# Altium PCB PCB_2020-01-20 19_33_48.pcbdoc
Units mm, origin at the board's own origin, x right, y up, seen from the top; angles counter-clockwise.
Board outline 121.43 x 96.61 mm, 2 copper layers (Top Layer, Bottom Layer); 25 components, 35 nets, 80 pads, 175 vias.
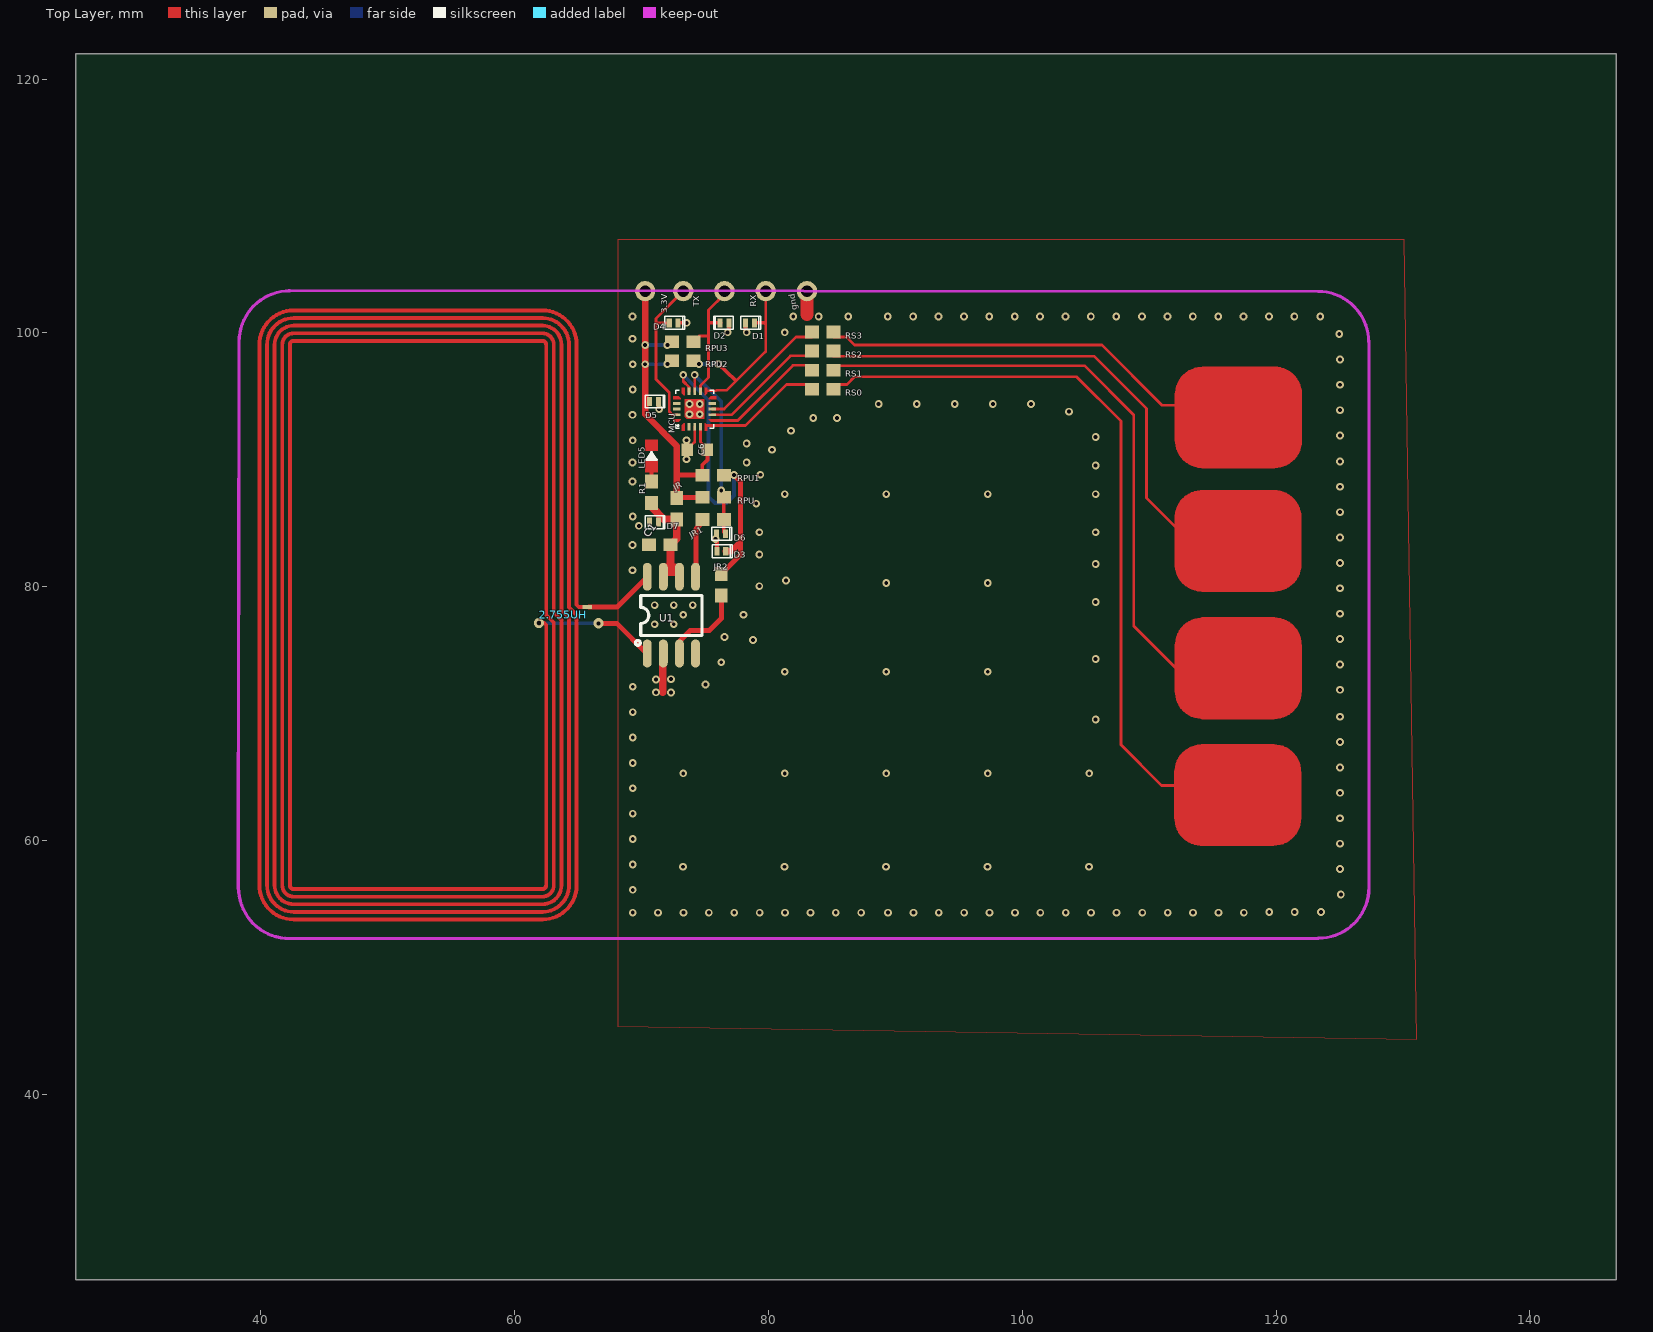
[diagram p0: Top Layer view]
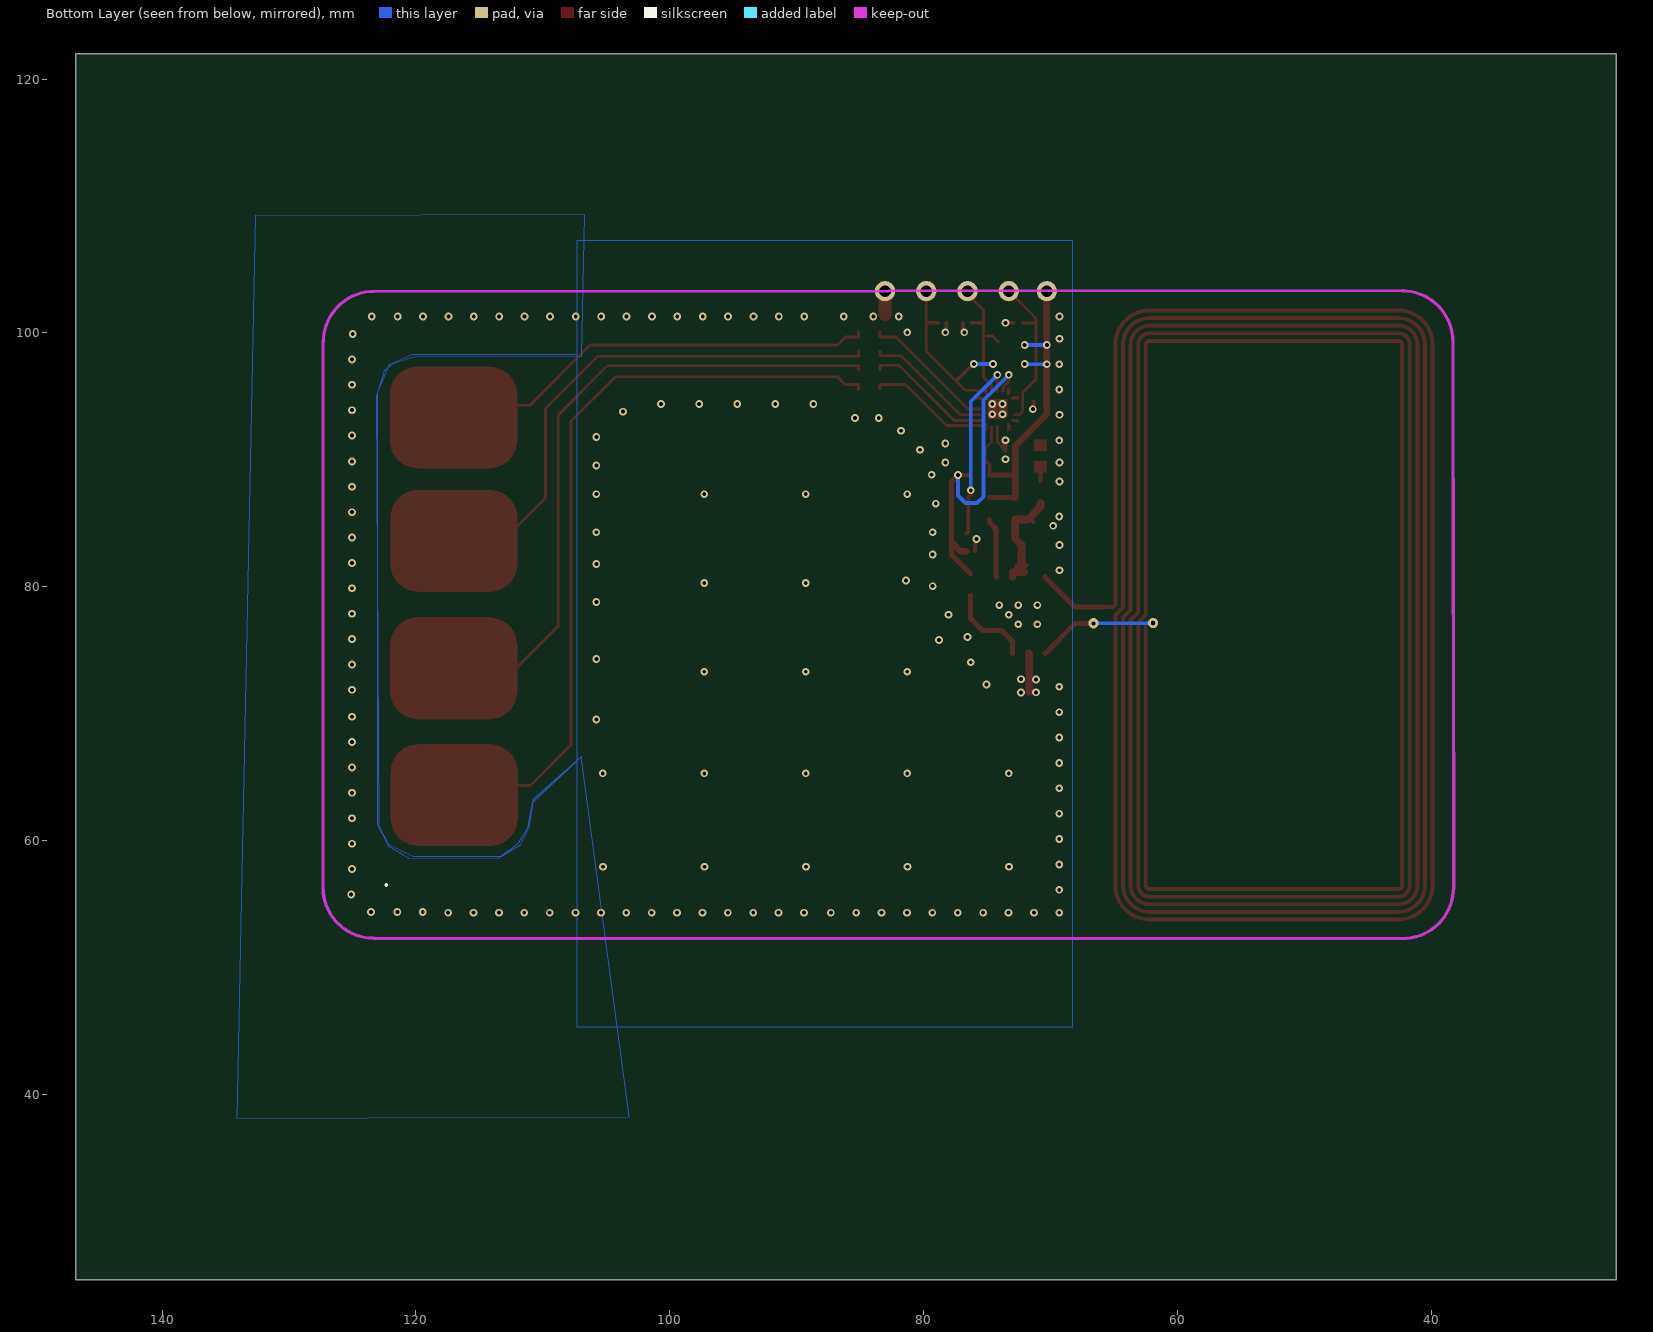
[diagram p1: Bottom Layer view, seen from below]

## Layer stack, top to bottom
Top Layer: signal copper (thickness not stored)
Dielectric: dielectric 0.32, FR-4, Dk 4.8
Bottom Layer: signal copper (thickness not stored)

## Board outline
146.827,25.4 25.4,25.4 25.4,122.01 146.827,122.01

## Components (designator, comment, footprint, x,y, rotation, side; value= is the part's Value field where it differs from the comment)
2.755UH "25X48MM_NFC_ANTENNA" 25X48MM_NFC_ANTENNA 52.387,77.77 r270 top
C1 "100nF" 0603 71.287,83.29 r0 top
C6 "100nF" 0603_N 75.187,90.79 r180 top
D1 "RCLAMP0521P-N" X1-DFN1006-2_L1.0-W0.6-RD 78.537,100.79 r180 top
D2 "RCLAMP0521P-N" X1-DFN1006-2_L1.0-W0.6-RD 76.537,100.79 r0 top
D3 "RCLAMP0521P-N" X1-DFN1006-2_L1.0-W0.6-RD 76.287,82.79 r180 top
D4 "RCLAMP0521P-N" X1-DFN1006-2_L1.0-W0.6-RD 72.537,100.79 r180 top
D5 "RCLAMP0521P-N" X1-DFN1006-2_L1.0-W0.6-RD 70.987,94.59 r180 top
D6 "RCLAMP0521P-N" X1-DFN1006-2_L1.0-W0.6-RD 76.257,84.17 r180 top
D7 "RCLAMP0521P-N" X1-DFN1006-2_L1.0-W0.6-RD 70.987,85.09 r180 top
JR "0" 0603 72.787,86.29 r270 top
JR1 "0" 0603 75.787,85.29 r180 top
JR2 "0" 0603 76.287,80.29 r270 top
LED5 "19-217/G7C-AN1P2/3T" 0603-LED 70.787,90.29 r270 top
MCU "ATTINY1616" VQFN-20_3.3_0.45MM_PITCH_LONGER_PADS 74.187,93.99 r90 top
R1 "14" 0603 70.787,87.29 r90 top
RPU "20K" 0603 75.787,87.04 r180 top
RPU1 "20K" 0603 75.787,88.79 r180 top
RPU2 "20K" 0603 73.087,99.29 r0 top
RPU3 "20K" 0603 73.087,97.79 r0 top
RS0 "1.05M" 0603 84.137,95.565 r0 top
RS1 "1.05M" 0603 84.137,97.065 r0 top
RS2 "1.05M" 0603 84.137,98.565 r0 top
RS3 "1.05M" 0603 84.137,100.065 r0 top
U1 "NT3H2111-NT3H2211" SOIC-8_150MIL 70.447,75.37 r90 top

## Footprints (in the part's own frame and the unit in brackets; to place one, negate y for a bottom-side part, rotate by r counter-clockwise, add the part's x,y. Pads: shape width x height; smd on the part's side, far side on the other; paste and mask are expansions set on the pad)
25X48MM_NFC_ANTENNA [mm]
  rect 0.3x0.75 smd: P$1(-0.635,13.335)
  round 0.808 hole 0.305 slot 0.32 at 0 deg: P$2(0.635,9.525)
  Top Layer lines w0.3: 0.635,9.525 0.635,9.935 0.8,10.1 21.3,10.1 cw(c21.3,9.8) 21.6,9.8 21.6,-9.8 cw(c21.3,-9.8) 21.3,-10.1 -21.3,-10.1 cw(c-21.3,-9.8) -21.6,-9.8 -21.6,9.8 cw(c-21.3,9.8) -21.3,10.1 0,10.1 0.6,10.7 21.3,10.7 cw(c21.3,9.8) 22.2,9.8 22.2,-9.8 cw(c21.3,-9.8) 21.3,-10.7 -21.3,-10.7 cw(c-21.3,-9.8) -22.2,-9.8 -22.2,9.8 cw(c-21.3,9.8) -21.3,10.7 -0.2,10.7 0.4,11.3 21.3,11.3 cw(c21.3,9.8) 22.8,9.8 22.8,-9.8 cw(c21.3,-9.8) 21.3,-11.3 -21.3,-11.3 cw(c-21.3,-9.8) -22.8,-9.8 -22.8,9.8 cw(c-21.3,9.8) -21.3,11.3 -0.4,11.3 0.2,11.9 21.3,11.9 cw(c21.3,9.8) 23.4,9.8 23.4,-9.8 cw(c21.3,-9.8) 21.3,-11.9 -21.3,-11.9 cw(c-21.3,-9.8) -23.4,-9.8 -23.4,9.8 cw(c-21.3,9.8) -21.3,11.9 -0.6,11.9 0,12.5 21.3,12.5 cw(c21.3,9.8) 24,9.8 24,-9.8 cw(c21.3,-9.8) 21.3,-12.5 -21.3,-12.5 cw(c-21.3,-9.8) -24,-9.8 -24,9.8 cw(c-21.3,9.8) -21.3,12.5 -0.8,12.5 -0.635,12.665 -0.635,13.335 -0.635,13.462
0603 [mm]
  rect 1.1x1 smd: 1(-0.7,0) 2(1,0)
0603-LED [mm]
  round 0 smd: MINUS(-0.85,0) PLUS(0.85,0)
  Top Layer region: -1.282,0.483 -0.418,0.483 -0.418,-0.483 -1.282,-0.483
  Top Layer region: 0.418,0.483 1.282,0.483 1.282,-0.483 0.418,-0.483
  silkscreen extent -0.3,-0.4 0.3,0.4
0603_N [mm]
  rect 0.9x1 smd: 1(0,0) 2(1.6,0)
SOIC-8_150MIL [mm]
  oval 2.2x0.7 smd: 1(-0.635,0) 2(-0.635,-1.27) 3(-0.635,-2.54) 4(-0.635,-3.81) 5(5.41,-3.81) 6(5.41,-2.54) 7(5.41,-1.27) 8(5.41,0)
  silkscreen extent 0.01,-4.32 3.94,0.93
VQFN-20_3.3_0.45MM_PITCH_LONGER_PADS [mm]
  round 0 smd: 1(-1.3,0.9) 5(-1.3,-0.9) 6(-0.9,-1.3) 10(0.9,-1.3) 11(1.3,-0.9) 15(1.3,0.9) 16(0.9,1.3) 20(-0.9,1.3) 21(0,0)
  rect 0.6x0.22 smd: 2(-1.4,0.45) 3(-1.4,0) 4(-1.4,-0.45) 12(1.4,-0.45) 13(1.4,0) 14(1.4,0.45)
  rect 0.22x0.6 smd: 7(-0.45,-1.4) 8(0,-1.4) 9(0.45,-1.4) 17(0.45,1.4) 18(0,1.4) 19(-0.45,1.4)
  Top Layer region: -0.775,0.62 -0.62,0.775 0.775,0.775 0.775,-0.775 -0.775,-0.775
  Top Layer region: -1.7,1.011 -1.26,1.011 -1.1,0.851 -1.1,0.79 -1.7,0.79
  Top Layer region: -1.011,-1.7 -1.011,-1.26 -0.851,-1.1 -0.79,-1.1 -0.79,-1.7
  Top Layer region: 1.011,1.7 1.011,1.26 0.851,1.1 0.79,1.1 0.79,1.7
  Top Layer region: 1.7,-1.011 1.26,-1.011 1.1,-0.851 1.1,-0.79 1.7,-0.79
  Top Layer region: 1.011,-1.7 1.011,-1.26 0.851,-1.1 0.79,-1.1 0.79,-1.7
  Top Layer region: 1.7,1.011 1.26,1.011 1.1,0.851 1.1,0.79 1.7,0.79
  Top Layer region: -1.011,1.7 -1.011,1.26 -0.851,1.1 -0.79,1.1 -0.79,1.7
  Top Layer region: -1.7,-1.011 -1.26,-1.011 -1.1,-0.851 -1.1,-0.79 -1.7,-0.79
  silkscreen extent -1.5,-1.5 1.5,1.5
X1-DFN1006-2_L1.0-W0.6-RD [mm]
  rect 0.4x0.7 smd: 1(-0.35,0) 2(0.35,0)
  silkscreen extent -0.85,-0.51 0.71,0.51

## Free pads (board coordinates)
  round 1.6 hole 0.914: 2(70.287,103.29) 2(73.287,103.29) 2(76.537,103.29) 2(79.787,103.29) 2(83.037,103.29)

## Via types
v1: diameter 0.61, hole 0.305, Top Layer to Bottom Layer, 174 vias
v2: diameter 0.808, hole 0.305, Top Layer to Bottom Layer, 1 vias

## Nets (pads, with @x,y where several pads share a name; then routed paths per layer and width w, separated by ;. In a path a pad name is that pad's centre, name@x,y a point inside that pad or via, vN(x,y) a via of type N, cw(c..) or ccw(c..) an arc to the next point about the centre after c; other vN are vias at no path point)
A: 
GND: C1.1 C6.2 D1.2 D2.2 D3.2 D4.1 D5.1 D6.2 D7.2 LED5.MINUS MCU.3 MCU.21 pad.2@83.037,103.29 U1.2 | length 11.6
  Top Layer w0.22: C6.2 74.187,91.39 MCU.3@74.187,92.59
  Top Layer w0.3: D5.1 71.337,94.04 v1(71.387,93.99) ; D4.1 v1(73.537,100.79) ; v1(75.827,83.75) 75.937,83.64 D3.2@75.937,82.79 ; v1(76.787,100.04) 76.887,100.14 D2.2 ; D1.2 78.187,100.14 v1(78.287,100.04)
  Top Layer w0.4: v1(73.537,91.54) 73.587,91.49 C6.2
  Top Layer w0.6: 71.687,71.665 71.687,74.705 U1.2
  Top Layer w1: 83.036,101.44 pad.2@83.036,103.29
  other v1: 69.307,54.31 71.307,54.31 73.307,54.31 75.307,54.31 77.307,54.31 79.307,54.31 81.307,54.31 83.307,54.31 85.307,54.31 87.307,54.31 89.427,54.31 91.427,54.309 93.427,54.31 95.427,54.309 97.427,54.31 99.427,54.309 101.427,54.31 103.427,54.309 105.427,54.31 107.427,54.309 109.467,54.31 111.467,54.31 113.467,54.31 115.467,54.31 117.467,54.31 119.467,54.37 121.467,54.369 123.547,54.37 125.107,55.75 69.307,56.11 125.047,57.75 73.267,57.93 81.267,57.93 89.267,57.93 97.267,57.93 105.267,57.93 69.307,58.11 125.047,59.75 69.307,60.11 125.047,61.75 69.307,62.11 125.047,63.75 69.307,64.11 73.287,65.29 81.287,65.29 89.287,65.29 97.287,65.29 105.287,65.29 125.047,65.75 69.307,66.11 125.047,67.75 69.307,68.11 105.787,69.54 125.047,69.75 69.307,70.11 72.317,71.66 71.137,71.67 125.047,71.87 69.307,72.11 75.037,72.29 71.137,72.69 72.317,72.71 81.287,73.29 89.287,73.29 97.287,73.29 125.048,73.87 76.287,74.04 105.787,74.29 78.787,75.79 125.047,75.87 76.537,76.04 71.037,77.04 72.537,77.04 73.287,77.79 78.037,77.79 125.048,77.87 71.037,78.54 72.537,78.54 74.037,78.54 105.787,78.79 125.047,79.87 79.287,80.04 89.287,80.29 97.287,80.29 81.387,80.49 69.287,81.29 105.787,81.79 125.048,81.87 79.287,82.54 69.287,83.29 125.047,83.87 79.287,84.29 105.787,84.29 69.787,84.79 69.307,85.53 125.048,85.87 79.037,86.54 81.287,87.29 89.287,87.29 97.287,87.29 105.787,87.29 125.047,87.87 69.287,88.29 79.362,88.815 105.787,89.54 69.287,89.79 78.287,89.79 125.048,89.87 73.537,90.04 80.287,90.79 78.287,91.29 69.307,91.53 105.787,91.79 125.047,91.91 81.787,92.29 83.537,93.29 85.412,93.29 69.287,93.54 73.787,93.59 74.587,93.59 103.687,93.79 125.047,93.91 73.787,94.39 74.587,94.39 88.687,94.39 91.687,94.39 94.687,94.39 97.687,94.39 100.687,94.39 69.307,95.53 125.047,95.91 69.307,97.53 125.047,97.91 69.287,99.54 124.987,99.91 81.287,100.04 69.287,101.29 81.957,101.29 83.957,101.29 86.287,101.29 89.407,101.29 91.407,101.29 93.407,101.29 95.407,101.29 97.407,101.29 99.407,101.29 101.407,101.29 103.407,101.29 105.407,101.29 107.407,101.29 109.447,101.29 111.447,101.291 113.447,101.29 115.447,101.291 117.447,101.29 119.447,101.291 121.447,101.29 123.487,101.29
LED5_PLUS: LED5.PLUS R1.2 | length 1.2
  Top Layer w0.3: R1.2 LED5.PLUS
MCU_1: MCU.1
MCU_2: MCU.2
MCU_5: MCU.5 RS0.1 | length 10.1
  Top Layer w0.22: MCU.5 78.188,92.69 81.436,95.939 83.438,95.939 RS0.1@83.438,95.565
MCU_6: MCU.6 RS1.1 | length 10.1
  Top Layer w0.22: MCU.6 77.587,93.09 81.937,97.44 83.438,97.44 RS1.1@83.438,97.064
MCU_7: MCU.7 RS2.1 | length 10.2
  Top Layer w0.22: MCU.7 77.087,93.54 81.736,98.189 83.438,98.189 RS2.1@83.438,98.565
MCU_8: MCU.8 RS3.1 | length 10.6
  Top Layer w0.22: MCU.8 76.513,93.99 82.188,99.665 83.438,99.665 RS3.1@83.438,100.064
MCU_9: MCU.9
MCU_10: MCU.10
MCU_15: MCU.15
MCU_16: MCU.16
MCU_17: MCU.17
MCU_18: MCU.18
MCU_20: MCU.20
PROG: D4.2 MCU.19 pad.2@73.287,103.29 | length 12.5
  Top Layer w0.22: MCU.19@72.788,93.541 72.437,93.541 72.188,93.79 72.188,95.289 71.137,96.34 71.137,101.141 pad.2@73.288,103.29
  Top Layer w0.3: 71.261,100.765 D4.2@72.188,100.79
RXD: D1.1 MCU.11 pad.2@79.787,103.29 RPU3.2 | length 15.1
  Top Layer w0.22: MCU.11 75.062,95.315 75.062,95.415 76.737,95.49 79.537,98.29 ; 79.536,98.291 79.788,98.54 pad.2@79.788,103.29
  Top Layer w0.3: v1@76.036,97.539 77.387,96.29 ; D1.1@78.837,100.79 79.739,100.775
  Bottom Layer w0.3: v1(74.537,97.54) v1(76.037,97.54)
S$210: 
S$239: 
S$31748: 
SCL: D3.1 JR2.1 MCU.14 RPU1.1 | length 26.6
  Top Layer w0.22: v1@73.288,96.691 73.288,96.19 73.738,95.741 MCU.14@73.738,95.39
  Top Layer w0.3: RPU1.1 v1(77.287,88.79)
  Top Layer w0.4: JR2.1 77.786,82.489 77.786,88.291 v1(77.287,88.79)
  Top Layer w0.5: D3.1@76.637,82.79 77.087,82.79 77.587,83.29
  Bottom Layer w0.3: v1@73.288,96.691 75.287,94.692 75.287,87.089 75.787,86.589 76.686,86.589 77.286,87.191 v1(77.287,88.79)
  other v1: 73.287,96.69
SCL_N: JR2.2 U1.3 | length 6.8
  Top Layer w0.4: U1.3 72.986,75.69 73.837,76.541 75.338,76.541 76.288,77.491 JR2.2@76.288,79.289
SDA: D6.1 JR1.1 MCU.13 RPU.1 | length 14.8
  Top Layer w0.22: MCU.13@74.187,95.39 v1(74.187,96.69)
  Top Layer w0.3: v1(76.287,87.59) 76.287,87.24 RPU.1 JR1.1 76.487,84.29 D6.1
  Bottom Layer w0.3: v1(74.187,96.69) 76.288,94.59 ; v1(76.287,87.59) 76.287,94.589
SDA_N: JR1.2 U1.5 | length 4.7
  Top Layer w0.4: U1.5 74.286,80.811 74.286,84.539 74.787,85.04 JR1.2
TXD: D2.1 MCU.12 pad.2@76.537,103.29 RPU2.2 | length 11
  Top Layer w0.22: RPU2.2 74.555,99.759 75.287,99.759 ; MCU.12 74.637,95.84 75.287,96.49 75.287,97.539 75.287,101.791 76.537,103.041 pad.2@76.537,103.29
  Top Layer w0.3: 75.338,100.808 D2.1@76.237,100.79
U1_1: 2.755UH.P$2 U1.1 | length 9.5
  Top Layer w0.4: v2(66.607,77.11) 68.047,77.11 70.422,74.735 U1.1
  Bottom Layer w0.3: 2.755UH.P$2 61.937,77.11 v2(66.607,77.11)
U1_4: U1.4
U1_8: 2.755UH.P$1 U1.8 | length 5.6
  Top Layer w0.4: 2.755UH.P$1@65.849,78.405 68.082,78.405 70.447,80.77 U1.8
VCC: C1.2 D7.1 JR.2 R1.1 U1.6 U1.7 | length 11
  Top Layer w0.3: D7.1 71.537,85.29 JR.2 ; U1.7@71.886,81.667 72.668,81.667 U1.6@72.668,81.311
  Top Layer w0.6: R1.1 70.787,86.29 71.787,85.29 JR.2 72.787,83.79 C1.2 72.287,81.131 ; U1.7@72.066,81.131 72.986,81.131 U1.6
VCC_M: C6.1 D5.2 JR.1 MCU.4 pad.2@70.287,103.29 RPU1.2 RPU2.1 RPU3.1 RPU.2 | length 29.6
  Top Layer w0.22: MCU.4 74.637,91.391 75.187,90.841 C6.1
  Top Layer w0.3: RPU1.2 74.787,89.589 75.188,89.99 C6.1@75.188,90.79
  Top Layer w0.4: JR.1@72.788,86.99 72.788,87.041 RPU.2 ; 72.787,88.785 72.787,88.79 RPU1.2
  Top Layer w0.5: 70.286,93.589 72.787,91.088 JR.1 ; 70.287,94.09 70.287,93.591 v1(70.287,97.524) v1(70.287,99.04) 70.287,103.288 pad.2@70.288,103.29
  Bottom Layer w0.3: v1(70.287,97.524) v1@72.038,97.539 ; v1(70.287,99.04) v1(72.037,99.04)
  other v1: 72.037,97.54
Y0: RS0.2 | length 112
  Top Layer w0.22: RS0.2@85.137,95.565 85.137,95.939 86.186,95.939 86.788,96.541 104.286,96.541 107.786,93.041 107.786,67.539 110.987,64.339 117.987,64.339
  Top Layer w0.3: 116.137,61.73 ccw(c114.137,61.73) 116.137,61.73 ; 116.137,65.42 ccw(c114.137,65.42) 116.137,65.42 ; 121.837,61.73 ccw(c119.837,61.73) 121.837,61.73 ; 121.837,65.43 ccw(c119.837,65.43) 121.837,65.43
Y1: RS1.2 | length 103.5
  Top Layer w0.22: RS1.2@85.137,97.064 85.137,97.415 104.913,97.415 108.787,93.541 108.787,76.889 112.386,73.29 118.287,73.29
  Top Layer w0.3: 116.177,71.72 ccw(c114.177,71.72) 116.177,71.72 ; 116.177,75.41 ccw(c114.177,75.41) 116.177,75.41 ; 121.877,71.72 ccw(c119.877,71.72) 121.877,71.72 ; 121.877,75.42 ccw(c119.877,75.42) 121.877,75.42
Y2: RS2.2 | length 94.5
  Top Layer w0.22: RS2.2@85.137,98.565 85.137,98.164 105.663,98.164 109.788,94.039 109.788,86.99 114.487,82.289 118.287,82.289
  Top Layer w0.3: 116.157,81.76 ccw(c114.157,81.76) 116.157,81.76 ; 116.157,85.45 ccw(c114.157,85.45) 116.157,85.45 ; 121.857,81.76 ccw(c119.857,81.76) 121.857,81.76 ; 121.857,85.46 ccw(c119.857,85.46) 121.857,85.46
Y3: RS3.2 | length 134.3
  Top Layer w0.22: RS3.2@85.137,100.064 85.137,99.665 86.163,99.665 86.788,99.04 106.288,99.04 111.037,94.29 116.288,94.29
  Top Layer w0.3: 116.187,91.49 ccw(c114.187,91.49) 116.187,91.49 ; 116.187,95.18 ccw(c114.187,95.18) 116.187,95.18 ; 116.197,91.49 ccw(c114.197,91.49) 116.197,91.49 ; 116.197,95.18 ccw(c114.197,95.18) 116.197,95.18 ; 121.887,91.49 ccw(c119.887,91.49) 121.887,91.49 ; 121.887,95.19 ccw(c119.887,95.19) 121.887,95.19 ; 121.897,91.49 ccw(c119.897,91.49) 121.897,91.49 ; 121.897,95.19 ccw(c119.897,95.19) 121.897,95.19

## Polygon pours and split planes (outlines as drawn)
GND on Bottom Layer (solid): 68.287,107.29 68.287,45.29 107.287,45.29 107.287,107.29
GND on Top Layer (solid): 68.107,107.35 68.107,45.35 131.107,44.35 130.107,107.35
GND on Bottom Layer (solid): 107.287,98.29 120.287,98.29 122.147,97.44 123.057,95.32 123.037,61.24 122.177,59.6 120.667,58.65 113.537,58.6 111.747,59.65 111.087,61.01 110.747,63.04 107.287,66.29
GND on Bottom Layer (solid): 106.987,66.6 110.817,63.21 111.227,60.91 111.937,59.76 112.477,59.29 113.387,58.71 120.227,58.71 122.097,59.62 122.877,61.11 123.077,95.01 122.467,97.04 121.807,97.6 120.207,98.12 106.937,98.17 106.707,109.31 132.667,109.22 134.127,38.1 103.177,38.24

## Keep-outs
Keep-Out Layer:
  lines w0.254 net U1_1: 38.247,56.27 ccw(c42.247,56.27) 42.247,52.27 ; 38.287,99.31 cw(c42.287,99.31) 42.287,103.31 ; 123.307,103.27 cw(c123.307,99.27) 127.307,99.27 ; 123.327,52.29 ccw(c123.327,56.29) 127.327,56.29

## Other copper
Top Layer:
  pour cut-out net A: 71.007,102.085 79.257,102.085 79.257,94.085 75.257,91.835 75.257,88.335 77.507,86.835 77.257,81.335 74.507,77.835 72.007,80.085 70.257,80.085 70.257,81.335 70.757,81.835 71.507,90.835 70.257,92.585
  region net Y0: 111.987,65.49 112.687,66.905 114.127,67.58 119.877,67.58 121.287,66.84 121.987,65.4 121.987,61.71 121.307,60.32 119.827,59.58 114.117,59.58 112.617,60.4 111.987,61.74 111.987,63.58
  region net Y1: 112.027,75.48 112.727,76.895 114.167,77.57 119.917,77.57 121.327,76.83 122.027,75.39 122.027,71.7 121.347,70.31 119.867,69.57 114.157,69.57 112.657,70.39 112.027,71.73 112.027,73.57
  region net Y2: 112.007,85.52 112.707,86.935 114.147,87.61 119.897,87.61 121.307,86.87 122.007,85.43 122.007,81.74 121.327,80.35 119.847,79.61 114.137,79.61 112.637,80.43 112.007,81.77 112.007,83.61
  region net Y3: 112.047,95.25 112.747,96.665 114.187,97.34 119.937,97.34 121.347,96.6 122.047,95.16 122.047,91.47 121.367,90.08 119.887,89.34 114.177,89.34 112.677,90.16 112.047,91.5 112.047,93.34
  region net Y3: 112.037,95.25 112.737,96.665 114.177,97.34 119.927,97.34 121.337,96.6 122.037,95.16 122.037,91.47 121.357,90.08 119.877,89.34 114.167,89.34 112.667,90.16 112.037,91.5 112.037,93.34
  pour cut-out net Y3: 117.037,98.29 106.787,98.29 106.787,67.29 112.037,59.54 120.287,59.29 123.037,61.54 123.037,95.54 119.537,98.29

## Silkscreen, mask and mechanical layers (free items; w line width, h text height)
Top Overlay:
  text "TX" at 74.537,102.04 h0.5 r90
  text "RX" at 79.037,102.04 h0.5 r90
  text "gnd" at 82.284,101.829 h0.5 r99
  text "3.3V" at 72.037,101.54 h0.5 r90
Bottom Overlay:
  lines w0.3 net S$31748: 122.347,56.48 122.347,56.5

## Text inside footprints (layer, text, board x,y; h text height)
LED5: Document "31.49606 x 35.43307" at 70.355,88.944 h0.05